# Altium PCB 3V3.PcbDoc
Units mm, origin at the board's own origin, x right, y up, seen from the top; angles counter-clockwise.
Board outline 14.2 x 17.9 mm, 2 copper layers (Top Layer, Bottom Layer); 17 components, 9 nets, 38 pads, 0 vias.
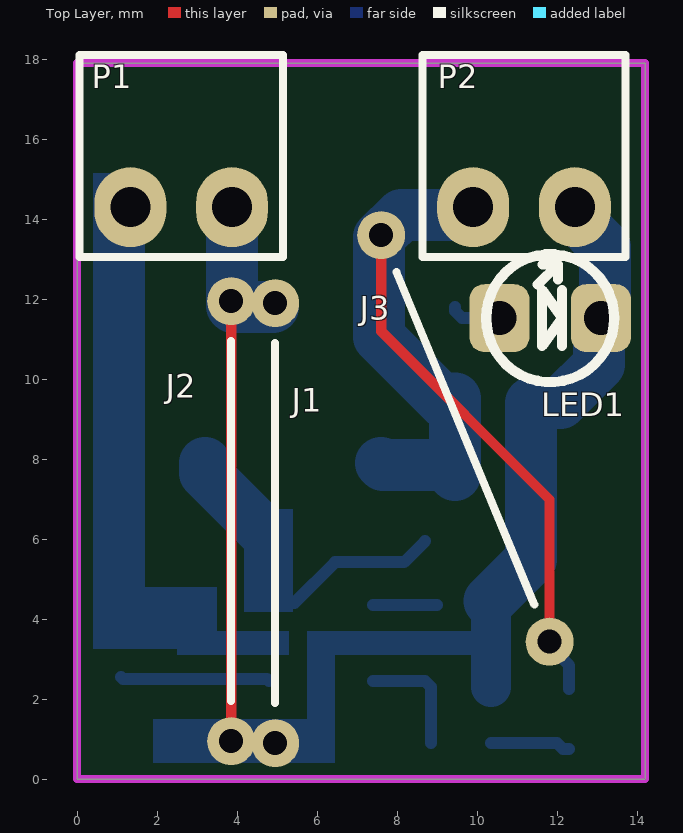
[diagram p0: Top Layer view]
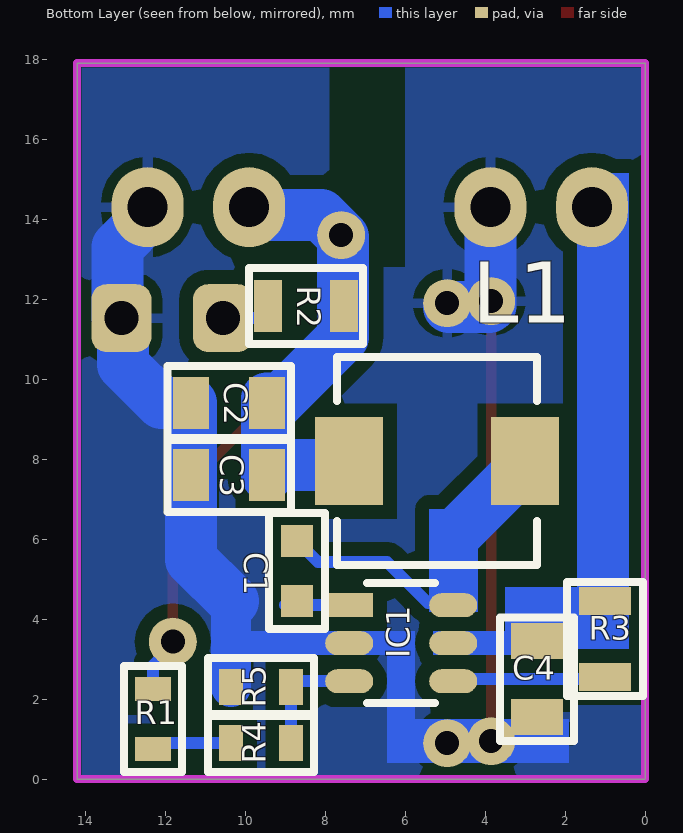
[diagram p1: Bottom Layer view, seen from below]
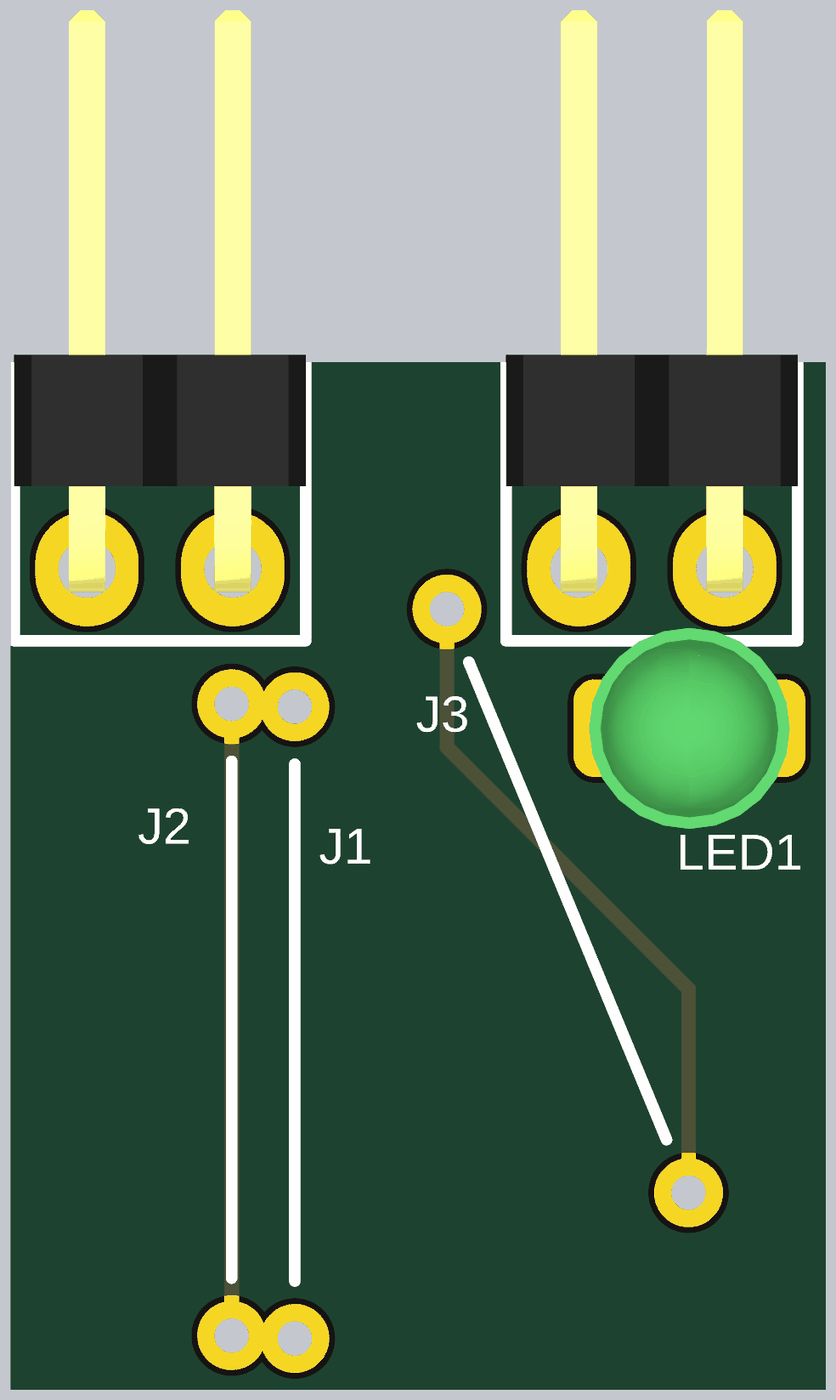
[diagram p2: 3D render of the assembled board from above, using the file's embedded part models]
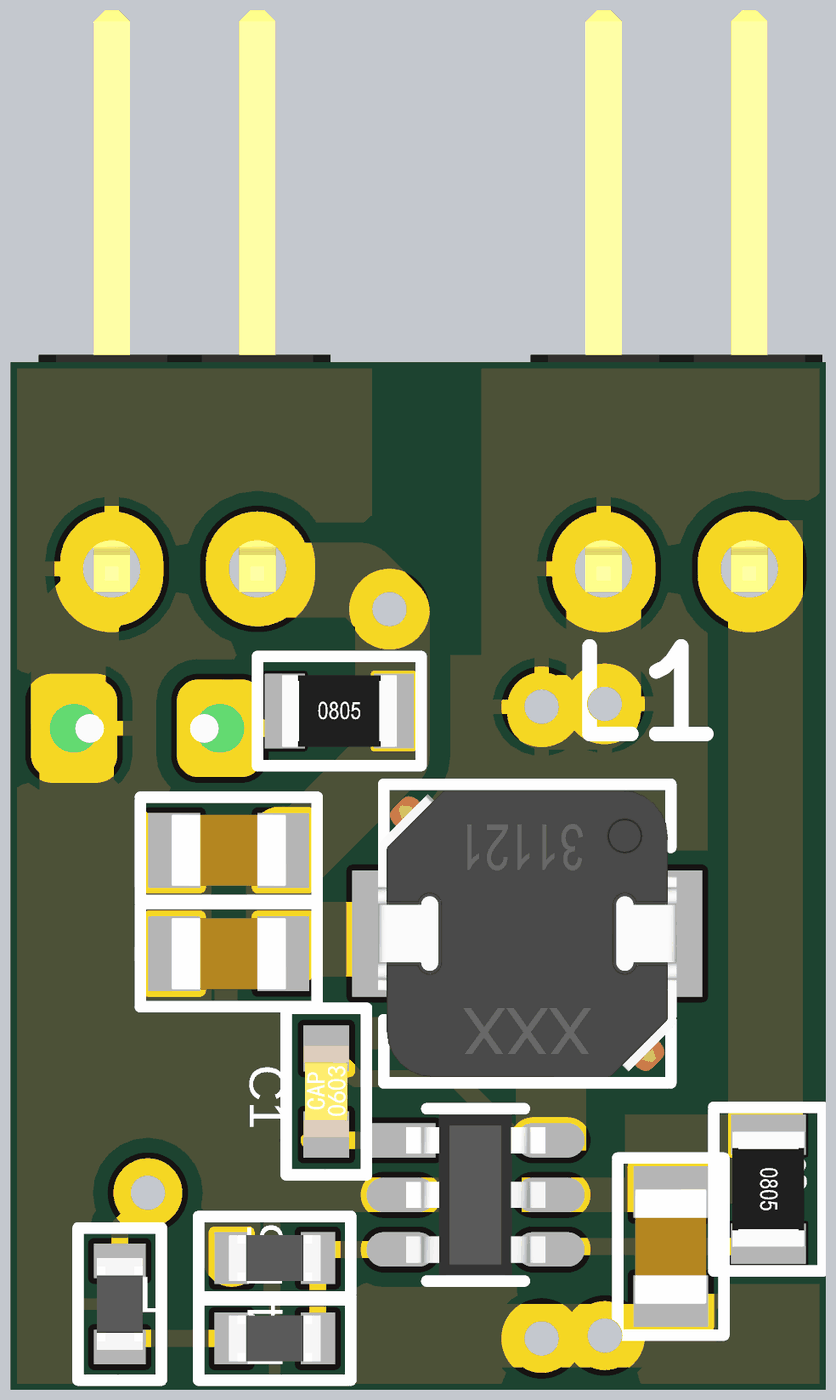
[diagram p3: 3D render of the assembled board from below, using the file's embedded part models]

## Layer stack, top to bottom
Top Solder: solder mask 0.0102, Solder Resist, Dk 3.5
Top Layer: signal copper 0.0356
Dielectric 1: dielectric 0.32, FR-4, Dk 4.8
Bottom Layer: signal copper 0.0356
Bottom Solder: solder mask 0.0102, Solder Resist, Dk 3.5

## Board outline
0,0 14.2,0 14.2,17.9 0,17.9

## Design rules (kind name [scope] priority, off if disabled: settings)
Clearance [All - Keepout vs All - Keepout] p1: gap=0.35 ignorepadtopadclearanceinfootprint=FALSE
HoleSize [All] p1: absolutevalues=TRUE maxlimit=4 minlimit=0.025 maxpercent=80.000 minpercent=20.000
MinimumAnnularRing [All] p1: minimumring=0.2
PolygonConnect [All] p1: connectstyle=Relief reliefconductorwidth=0.254 reliefentries=4 polygonreliefangle="90 Angle" airgapwidth=0.254
RoutingVias [All] p1: holewidth=0.711 width=1.27 viastyle="Through Hole" minholewidth=0.711 minwidth=1.27 maxholewidth=0.711 maxwidth=1.27
SolderMaskExpansion [All] p1: expansion=0.102 istentingtop=FALSE
SupplyNets "Schematic Supply Nets_3" [InNet('GND')] p1: voltage=0.000
SupplyNets "Schematic Supply Nets_2" [InNet('+5Vdigital')] p2: voltage=0.000
SupplyNets "Schematic Supply Nets" [InNet('+3V3digital')] p3: voltage=0.000
UnConnectedPin [All] p1:
UnRoutedNet [All] p1: checkbadconnections=TRUE
Width [All] p1: maxlimit=2 minlimit=0.2 preferedwidth=0.3 toplayer_minwidth=0.254 toplayer_maxwidth=0.254 toplayer_prefwidth=0.254 minimp=50.000000 maximp=50.000000 favimp=50.000000
28 further rules are at their usual default settings.

## Components (designator, comment, footprint, x,y, rotation, side; value= is the part's Value field where it differs from the comment)
C1 "22nF/50V/0603" "cap 0603" 8.7,5.2 r90 bottom
C2 "22uF/50V/0805" "CAP 0805" 10.4,9.4 r0 bottom
C3 "22uF/50V/0805" "CAP 0805" 10.4,7.6 r0 bottom
C4 "22uF/50V/0805" "CAP 0805" 2.7,2.5 r90 bottom
IC1 "MT2492" SOT23-6 6.1,3.4 r180 bottom
J1 "Jumper" "JUMPER 11MM" 4.95,0.9 r90 top
J2 "Jumper" "JUMPER 11MM" 3.85,0.95 r90 top
J3 "Jumper" "JUMPER 11MM" 11.81,3.437 r112.5 top
L1 "4.7uH/3A" 5030 5.2,7.95 r0 bottom
LED1 "LED 3mm/Green" "LED 3MM" 11.8,11.5 r0 top
P1 "XH2PIN" "PIN-HEADER 2*1" 2.6,14.3 r0 top
P2 "XH2PIN" "PIN-HEADER 2*1" 11.17,14.3 r0 top
R1 "36k/0805" "Resistor 0603" 12.3,1.5 r90 bottom
R2 "220R/0805" "RES 0805" 8.475,11.825 r180 bottom
R3 "1M/0805" "RES 0805" 1,3.5 r270 bottom
R4 "36k/0805" "Resistor 0603" 9.6,0.9 r0 bottom
R5 "15k/0805" "Resistor 0603" 9.6,2.3 r180 bottom

## Footprints (in the part's own frame and the unit in brackets; to place one, negate y for a bottom-side part, rotate by r counter-clockwise, add the part's x,y. Pads: shape width x height; smd on the part's side, far side on the other; paste and mask are expansions set on the pad)
5030 [mm]
  rect 1.7x2.2 smd: 1(-2.2,0) 2(2.2,0)
  silkscreen extent -2.5,-2.6 2.5,2.6, body extent -2.6,-2.5 2.6,2.5, height 3
"cap 0603" [mm]
  rect 0.8x0.8 smd: 1(-0.75,0) 2(0.75,0)
  silkscreen extent -1.45,-0.7 1.45,0.7, body extent -0.8,-0.4 0.8,0.4, height 0.8
"CAP 0805" [mm]
  rect 0.9x1.3 smd: 1(-0.95,0) 2(0.95,0)
  silkscreen extent -1.54,-0.92 1.54,0.92, body extent -1,-0.63 1,0.62, height 1
"JUMPER 11MM" [mm]
  round 1.2 hole 0.6: 1(0,0) 2(11,0)
  silkscreen extent 1,0 10,0
"LED 3MM" [mm]
  rrect50% 1.5x1.7 hole 0.85 mask+0.1: 1(-1.245,0.025) 2(1.295,0.025)
  silkscreen extent -1.57,-1.57 1.63,1.62, body extent -1.72,-1.73 1.78,1.77, height 3.9
"PIN-HEADER 2*1" [mm]
  oval 1.8x2 hole 1: 1(-1.27,0) 2(1.27,0)
  silkscreen extent -2.54,-1.25 2.54,3.8, body extent -2.54,-0.4 2.54,9.73, height 2.51
"RES 0805" [mm]
  rect 0.7x1.3 smd mask+0.051: 1(-0.95,0) 2(0.95,0)
  silkscreen extent -1.43,-0.95 1.43,0.95, body extent -1,-0.63 1,0.63, height 0.5
"Resistor 0603" [mm]
  rect 0.6x0.9 smd: 1(-0.75,0) 2(0.75,0)
  silkscreen extent -1.32,-0.73 1.33,0.73, body extent -0.8,-0.4 0.8,0.4, height 0.37
SOT23-6 [mm]
  rect 1.2x0.6 smd: 1(-1.3,0.95)
  oval 1.2x0.6 smd: 2(-1.3,0) 3(-1.3,-0.95) 4(1.3,-0.95) 5(1.3,0) 6(1.3,0.95)
  silkscreen extent -0.85,-1.5 0.85,1.5, body extent -1.21,-1.4 1.21,1.4, height 1.09

## Part data
C1 C2 C3 C4: library part Capacitor, "Capacitor"
IC1: library part ME3116AM6G
L1: library part Inductor, "Inductor"
LED1: library part LED, "Typical LED", COLOR=Green
P1 P2: library part "Header 2H", "RELAY", LatestRevisionDate=17-Jul-2002, LatestRevisionNote="Re-released for DXP Platform.", Publisher="Altium Limited"
R1 R3 R4 R5: library part Res1, "Resistor", LatestRevisionDate=17-Jul-2002, LatestRevisionNote="Re-released for DXP Platform.", PackageDescription="Axial Device, Thru-Hole; 2 Leads; 0.3 in Pin Spacing", PackageReference=AXIAL-0.3, Published=8-Jun-2000, Publisher="Altium Limited"
R2: library part Res

## Nets (pads, with @x,y where several pads share a name; then routed paths per layer and width w, separated by ;. In a path a pad name is that pad's centre, name@x,y a point inside that pad or via, vN(x,y) a via of type N, cw(c..) or ccw(c..) an arc to the next point about the centre after c; other vN are vias at no path point)
+3V3digital: C2.1 C3.1 J3.1 J3.2 L1.2 P2.1 R1.2 R2.2 | length 24.9
  Top Layer w0.254: J3.2 7.6,11.2 11.81,6.99 J3.1
  Bottom Layer w0.3: J3.1 11.81,3.336 12.3,2.846 R1.2
  Bottom Layer w1.3: L1.2@7.6,7.9 7.65,7.85 9.2,7.85 C3.1 C2.1@9.45,9.522 ; C2.1 9.2,9.4 7.55,11.05 7.55,12.2 7.55,13.55 8.104,14.104 9.704,14.104 P2.1
+5Vdigital: C4.2 IC1.5 P1.1 R3.1 | length 0.1
  Bottom Layer w0.3: C4.2@2.6,3.45 C4.2@2.7,3.35
GND: C2.2 C3.2 C4.1 IC1.2 J1.1 J1.2 J2.1 J2.2 LED1.2 P1.2 P2.2 R5.1 | length 28.2
  Top Layer w0.254: J2.1@3.85,0.75 J2.2@3.85,11.75
  Bottom Layer w1: 10.306,4.45 10.35,4.406 R5.1
  Bottom Layer w1.3: P1.2 3.87,11.83 3.9,11.8 J1.2@4.9,11.8 ; 10.306,4.45 11.35,5.494 C3.2 C2.2 12.088,9.4 13.049,10.362 13.049,11.28 LED1.2@13.095,11.325 ; P2.2 12.44,14.065 13.196,13.309 13.196,11.526 LED1.2@13.195,11.525
NetC1_1: C1.1 IC1.1 | length 1.6
  Bottom Layer w0.3: IC1.1 C1.1@9,4.35
NetC1_2: C1.2 IC1.6 L1.1 | length 6.9
  Bottom Layer w0.3: IC1.6 4.857,4.407 5.432,4.407 6.45,5.425 8.175,5.425 C1.2
  Bottom Layer w1.3: L1.1@3.2,7.9 3.2,7.65 4.7,6.15
NetIC1_4: IC1.4 R3.2 | length 3.7
  Bottom Layer w0.3: R3.2@1.1,2.55 1.15,2.5 4.75,2.5 IC1.4
NetLED1_1: LED1.1 R2.1 | length 1.3
  Bottom Layer w0.3: R2.1@9.45,11.8 9.45,11.7 9.625,11.525 LED1.1
NetR1_1: R1.1 R4.2 | length 2
  Bottom Layer w0.3: R4.2 12,0.9 12.15,0.75 R1.1
V_fb: IC1.3 R4.1 R5.2 | length 2.9
  Bottom Layer w0.3: IC1.3 8.7,2.45 R5.2 R4.1

## Polygon pours and split planes (outlines as drawn)
GND on Bottom Layer "d" (solid, remove dead copper, pour order 1): 0,17.9 0,0 14.2,0 14.2,17.9 7.9,17.9 7.9,12.9 7.8,12.8 6,12.8 6,17.9

## Keep-outs
Keep-Out Layer:
  the board outline again, w0.2

## Other copper
Bottom Layer:
  rectangle net NetC1_2: 4.175,4.175 5.4,6.75
  rectangle net +5Vdigital: 0.4,3.85 1.7,15.15
  region net GND: 10.35,3.7 5.9,3.7 5.9,3.1 10.35,3.1
  rectangle net GND: 1.9,0.4 6.45,1.5
  rectangle net GND: 5.75,0.8 6.45,3.7
  rectangle net +5Vdigital: 0.4,3.25 3.5,4.8
  rectangle net +5Vdigital: 2.5,3.1 5.3,3.7